# Altium PCB N-DAP.PcbDoc
Units mm, origin at the board's own origin, x right, y up, seen from the top; angles counter-clockwise.
Board outline 32.5 x 19.5 mm, 4 copper layers (Top Layer, GND PLANE, Signal Layer 1, Bottom Layer), stack 1.577 mm thick; 34 components, 41 nets, 126 pads, 46 vias.
Unrouted connection lines stored in the file: 7.
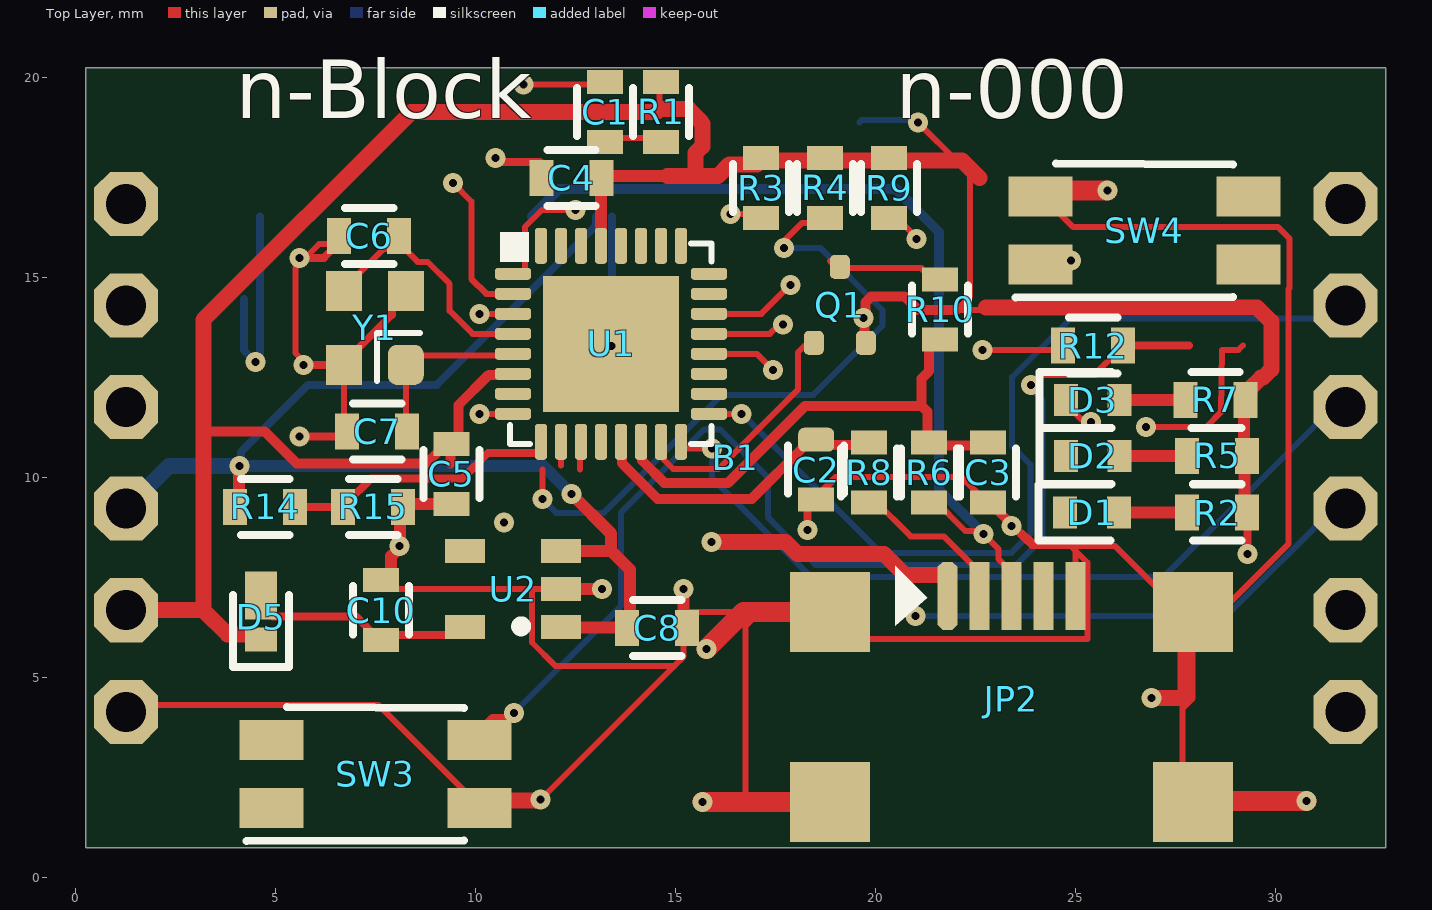
[diagram p0: Top Layer view]
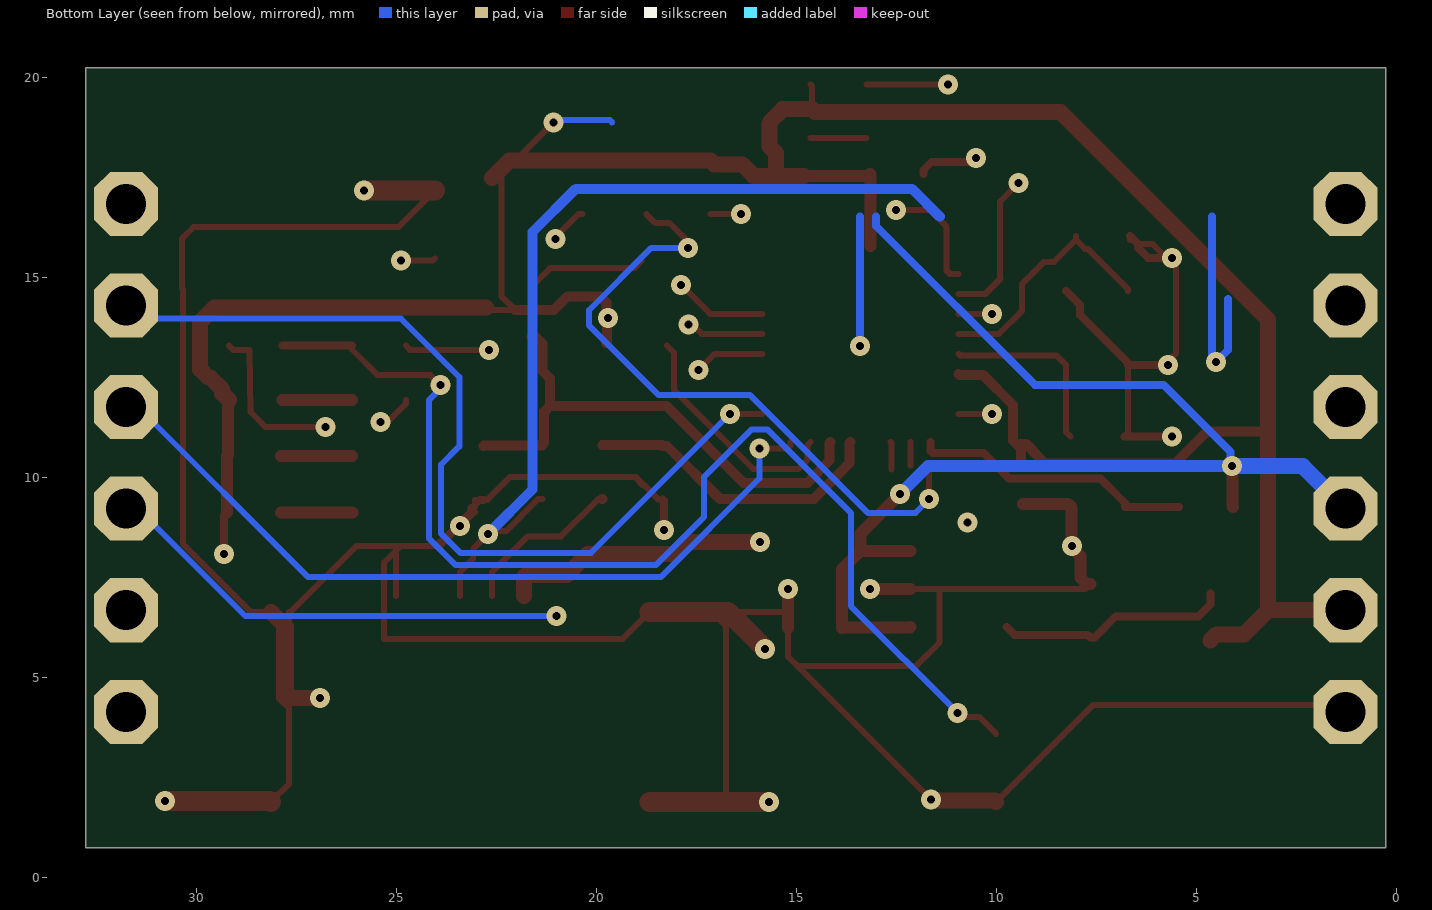
[diagram p1: Bottom Layer view, seen from below]
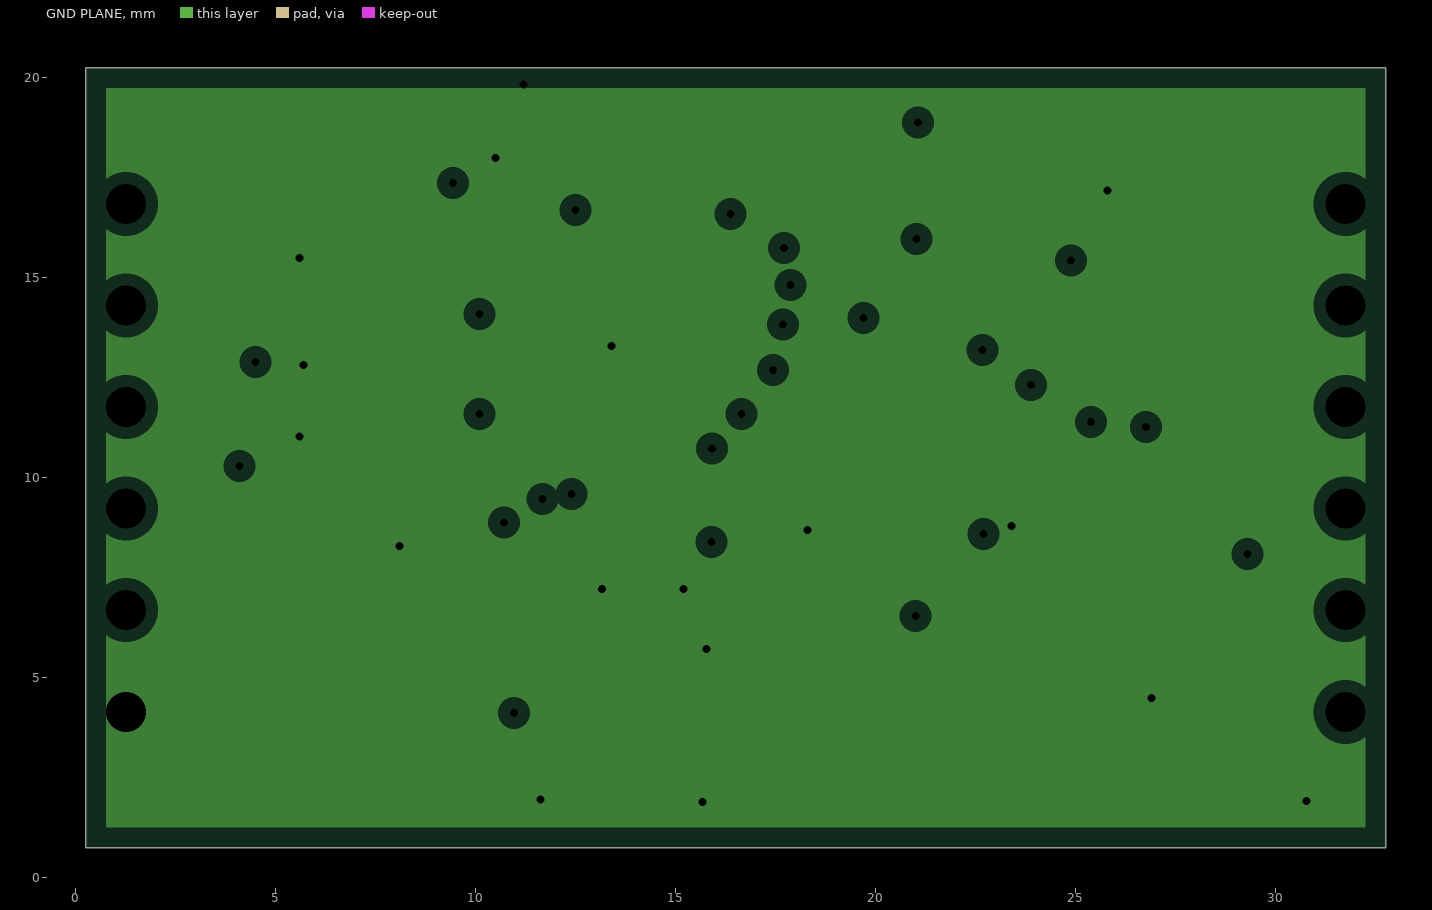
[diagram p2: GND PLANE, clearances drawn from the general rule]
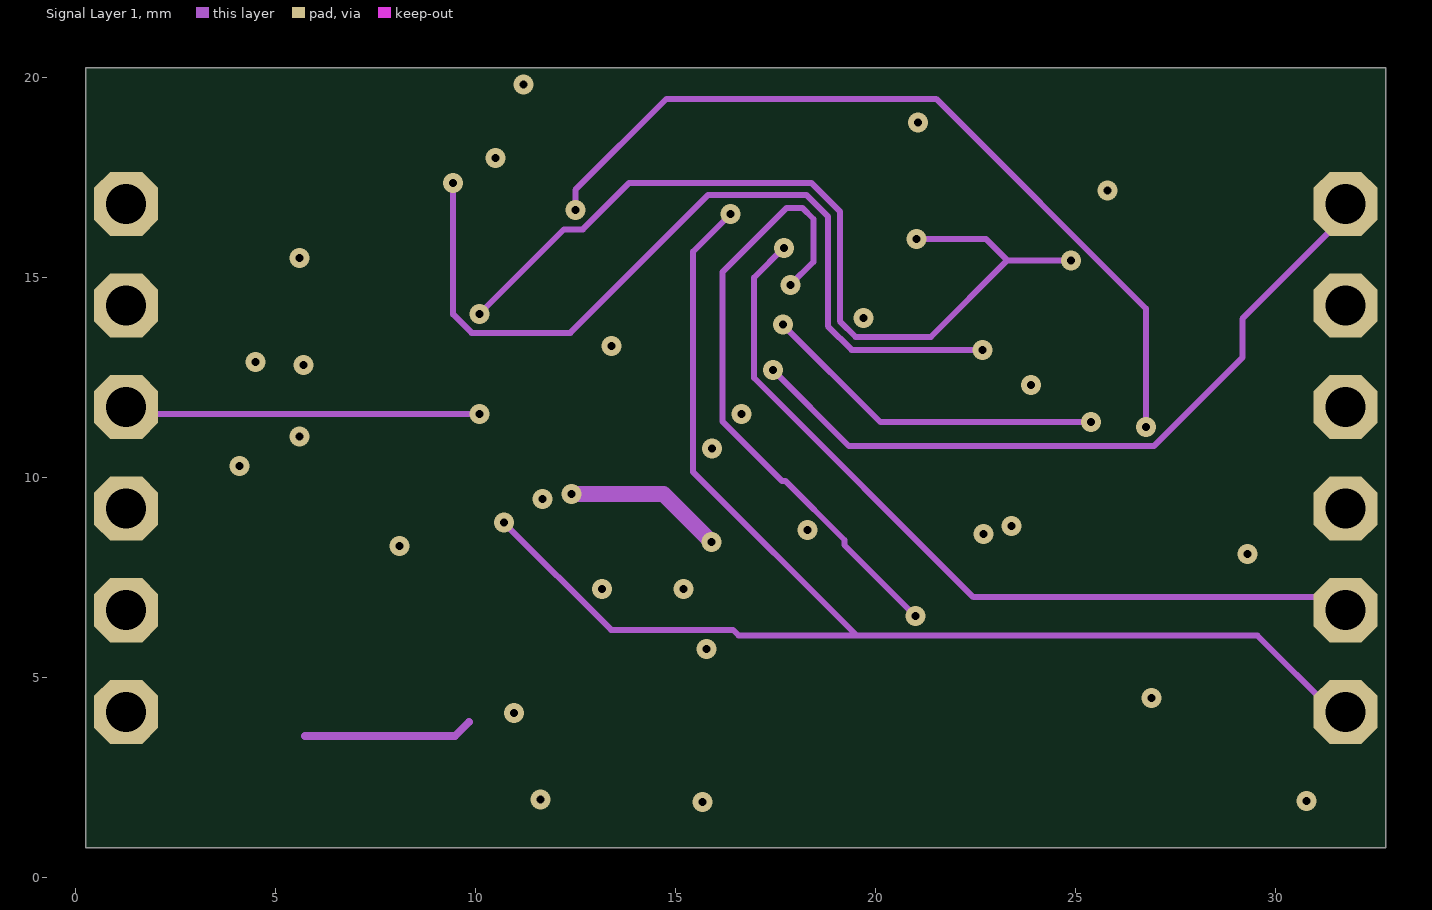
[diagram p3: Signal Layer 1]
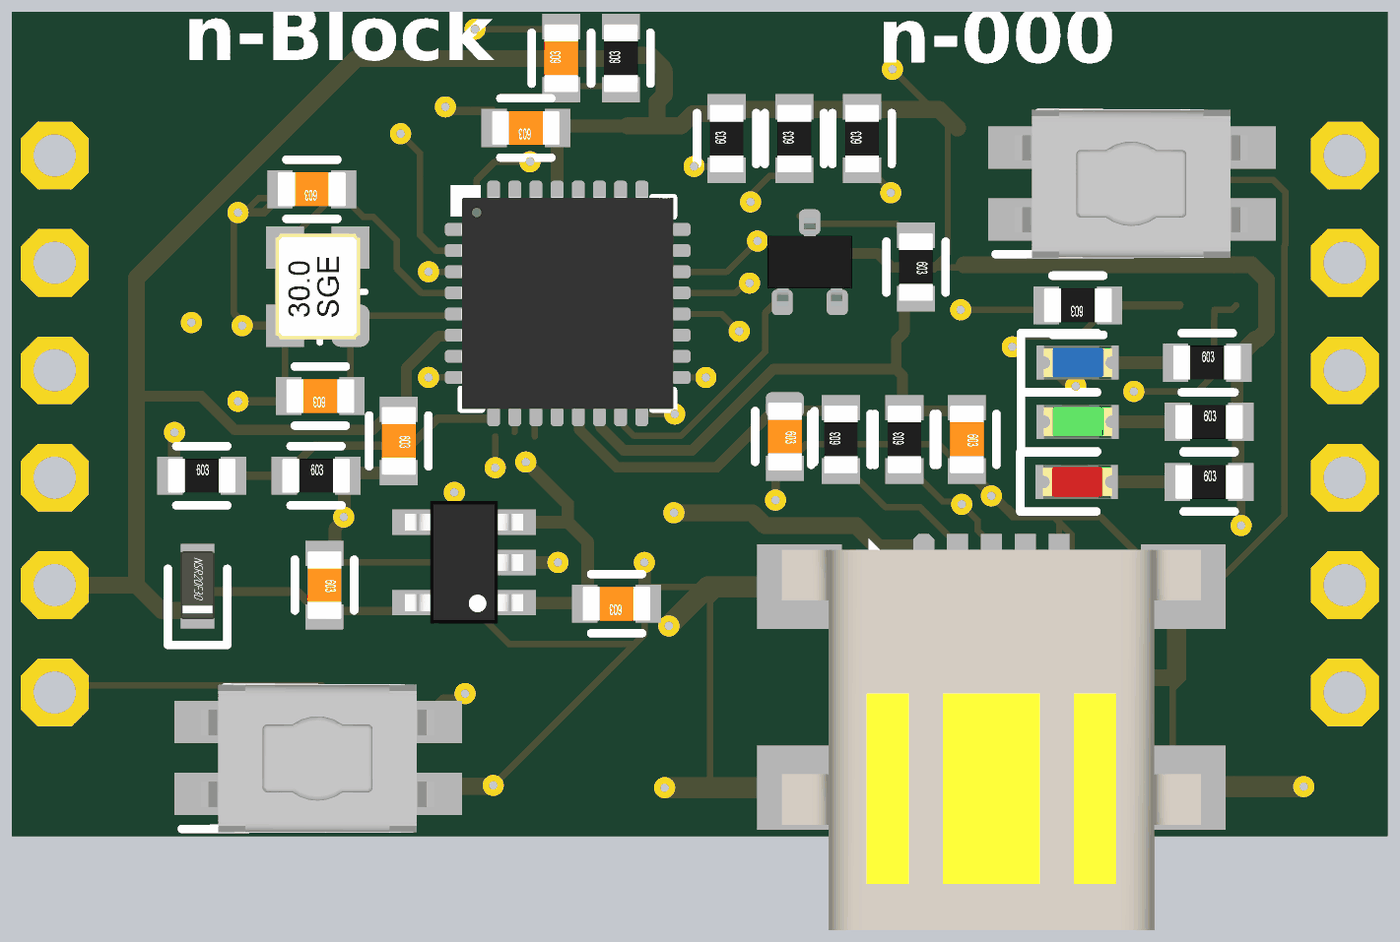
[diagram p4: 3D render of the assembled board from above, using the file's embedded part models]

## Layer stack, top to bottom
Top Solder: solder mask 0.0102, Solder Resist, Dk 3.5
Top Layer: signal copper 0.0356
Dielectric1: core 0.48, FR-4, Dk 4.8
GND PLANE: plane copper 0.036, net GND
Dielectric 4: prepreg 0.7, Dk 4.2
Signal Layer 1: signal copper 0.036
Dielectric 3: core 0.254, Dk 4.2
Bottom Layer: signal copper 0.0356
Bottom Solder: solder mask 0.0102, Solder Resist, Dk 3.5

## Board outline
0.26,0.75 32.76,0.75 32.76,20.25 0.26,20.25

## Design rules (kind name [scope] priority, off if disabled: settings)
Clearance "Clearance IN CLASS 1mm" [(InNetClass('CL-1mm'))] p1 off: gap=1 ignorepadtopadclearanceinfootprint=FALSE except(0: Arc-Hole Track-Hole SMDPad-Hole THPad-Hole Via-Hole Fill-Hole Poly-Hole Region-Hole Text-Hole)
Clearance Clearance_GND_PLANE [InNamedPolygon('GND_POLY_TOP')] p2 off: gap=0.4 ignorepadtopadclearanceinfootprint=FALSE except(0: Arc-Hole Track-Hole SMDPad-Hole THPad-Hole Via-Hole Fill-Hole Poly-Hole Region-Hole Text-Hole)
Clearance Clearance_+5V_POLY [InNamedPolygon('poly_+5V-bottom')] p3 off: gap=0.5 ignorepadtopadclearanceinfootprint=FALSE except(0: Arc-Hole Track-Hole SMDPad-Hole THPad-Hole Via-Hole Fill-Hole Poly-Hole Region-Hole Text-Hole)
Clearance [All] p4: gap=0.15 ignorepadtopadclearanceinfootprint=FALSE except(0: Arc-Hole Track-Hole SMDPad-Hole THPad-Hole Via-Hole Fill-Hole Poly-Hole Region-Hole Text-Hole)
ComponentClearance [InComponentClass('N-DAP')] p1: gap=0.2 collisioncheckmode=3 verticalgap=0.2 showdistances=TRUE
MinimumAnnularRing [All] p1: minimumring=0.124
PlaneClearance [All] p1: clearance=0.3
PlaneConnect Plane_ConnectStyle_1 [(Name = 'C1-1') Or (Name = 'C1-2') Or (Name = 'C2-1') Or (Name = 'C2-2') Or (Name = 'C3-1') Or (Name = 'C3-2') Or (Name = 'C4-1') Or (Name = 'C4-2') Or (Name = 'C5-1') Or (Name = 'C5-2') Or (Name = 'C6-1') Or (Name = 'C6-2') Or (Name = 'C7-1')] p1 off: planeconnectstyle=Relief reliefexpansion=1.27 reliefentries=4 reliefconductorwidth=0.381 reliefairgap=0.508
PlaneConnect [All] p2: planeconnectstyle=Direct reliefexpansion=0.635 reliefentries=4 reliefconductorwidth=0.305 reliefairgap=0.254
PolygonConnect [All] p1: connectstyle=Direct reliefconductorwidth=0.254 reliefentries=4 polygonreliefangle="90 Angle" airgapwidth=0.254
RoomDefinition N-DAP [InComponentClass('N-DAP')] p1: confinementstyle=ConfineIn formatcopy=TRUE lockcomponents=FALSE outline -4.96,45.306 33.775,45.306 33.775,2.126 -4.96,2.126
RoutingVias VIASWITDTH2MM [(InNetClass('W-2mm'))] p1 off: holewidth=1 width=1.8 viastyle="Through Hole" minholewidth=0.4 minwidth=0.7 maxholewidth=1 maxwidth=1.8
RoutingVias VIASWITDTH1MM [(InNetClass('W-2mm'))] p2 off: holewidth=0.5 width=1 viastyle="Through Hole" minholewidth=0.5 minwidth=1 maxholewidth=0.5 maxwidth=1
RoutingVias VIASWITDTH1.5MM [(InNetClass('W-2mm'))] p3 off: holewidth=0.9 width=1.4 viastyle="Through Hole" minholewidth=0.9 minwidth=1.4 maxholewidth=0.9 maxwidth=1.4
RoutingVias [All] p4: holewidth=0.2 width=0.5 viastyle="Through Hole" minholewidth=0.2 minwidth=0.5 maxholewidth=4 maxwidth=2
SilkToSolderMaskClearance SilkscreenOverComponentPads [IsPad] p1: minsilkscreentomaskgap=0.254 clearancetoexposedcopper=TRUE
SolderMaskExpansion [All] p1: expansion=0 istentingtop=FALSE
Width 12V_PLANE [(InNet('+12V')) and (IsPolygon)] p1 off: maxlimit=0.3 minlimit=0.2 preferedwidth=0.2
Width GND_PLANE [(InNet('GND'))  and (IsPolygon)] p2 off: maxlimit=0.3 minlimit=0.2 preferedwidth=0.2
Width WIDTH2MM [(InNetClass('W-2mm'))] p3 off: maxlimit=2 minlimit=0.25 preferedwidth=2
Width WIDTH1.5MM [(InNetClass('W-1.5mm'))] p4 off: maxlimit=2 minlimit=0.5 preferedwidth=1.5
Width "WIDTH 1MM" [(InNetClass('W-1mm'))] p5 off: maxlimit=2 minlimit=0.75 preferedwidth=1
Width WIDTH0.5MM [(InNetClass('W-0.5mm'))] p6 off: maxlimit=2 minlimit=0.25 preferedwidth=0.5
Width WIDTH0.25MM [(InNetClass('W-0.25mm'))] p7 off: maxlimit=2 minlimit=0.2 preferedwidth=0.25
Width [All] p8: maxlimit=2 minlimit=0.149 preferedwidth=0.15
26 further rules are at their usual default settings.

## Components (designator, comment, footprint, x,y, rotation, side; value= is the part's Value field where it differs from the comment)
B1 "N-5" N-5 16.51,10.5 r0 top locked
C1 "100nF" 0603_CAP_SMALL#1 13.24,19.151 r90 top
C2 "18pF" 0603_CAP_SMALL#2 18.52,10.203 r270 top
C3 "18pF" 0603_CAP_SMALL#1 22.82,10.136 r270 top
C4 "100nF" 0603_CAP_SMALL#1 12.4,17.5 r180 top
C5 "100nF" 0603_CAP_SMALL#1 9.4,10.1 r270 top
C6 "33pF" 0603_CAP_SMALL#1 7.345,16.051 r180 top
C7 "33pF" 0603_CAP_SMALL#1 7.545,11.16 r180 top
C8 "1uF/MLCC" 0603_CAP_SMALL#1 14.545,6.251 r180 top
C10 "1uF/MLCC" 0603_CAP_SMALL#1 7.645,6.69 r270 top
D1 "LED_RED_0603" 0603_LED_RED 25.43,9.131 r180 top
D2 "LED_GRN_0603" 0603_LED_GRN 25.445,10.551 r180 top
D3 "LED_BLU_0603" 0603_LED_BLU 25.445,11.951 r180 top
D5 "NSR20F30NXT5G" 0603_DIODE-NSR20F30 4.645,6.526 r270 top
JP2 "USB-MINI-B" USB-MINI-B-HIR-UX60A-MB-5ST-SMALL 23.4,4.4 r180 top
Q1 "BSS84" SOT323/SC70-3_SMALL 19.11,14.325 r180 top
R1 "10K" 0603_res_SMALL 14.645,19.151 r90 top
R2 "680R" 0603_res_SMALL 28.545,9.131 r0 top
R3 "10K" 0603_res_SMALL 17.145,17.251 r90 top
R4 "10K" 0603_res_SMALL 18.745,17.251 r90 top
R5 "470R" 0603_res_SMALL 28.545,10.551 r0 top
R6 "33R" 0603_res_SMALL 21.345,10.136 r90 top
R7 "470R" 0603_res_SMALL 28.5,11.951 r0 top
R8 "33R" 0603_res_SMALL 19.845,10.136 r90 top
R9 "10K" 0603_res_SMALL 20.345,17.251 r90 top
R10 "1.5K" 0603_res_SMALL 21.62,14.211 r270 top
R12 "0R" 0603_res_SMALL 25.445,13.308 r180 top
R14 "10K" 0603_res_SMALL 4.745,9.276 r0 top
R15 "18K" 0603_res_SMALL 7.445,9.276 r0 top
SW3 "EVQ-P2202M" BUTTON_4.7x3.5mm 7.5,2.6 r90 top
SW4 "EVQ-P2202M" BUTTON_4.7x3.5mm 26.725,16.19 r90 top
U1 "LPC11U35FHI33/501" QFN32_0.5mm_PAD 13.39,13.351 r0 top
U2 "TPS78233" SOT23-5_0.95MM-NOSILK 10.94,7.226 r90 top
Y1 "12MHz" CRY-SMD4-2.5x2mm 7.484,13.75 r90 top

## Footprints (in the part's own frame and the unit in brackets; to place one, negate y for a bottom-side part, rotate by r counter-clockwise, add the part's x,y. Pads: shape width x height; smd on the part's side, far side on the other; paste and mask are expansions set on the pad)
0603_CAP_SMALL#1 [mm]
  rect 0.6x0.9 smd: 1(-0.75,0) 2(0.75,0)
  silkscreen extent -0.6,-0.7 0.6,0.7, body extent -0.8,-0.4 0.8,0.4, height 0.3
0603_CAP_SMALL#2 [mm]
  rrect50% 0.6x0.9 smd: 1(-0.75,0)
  rect 0.6x0.9 smd: 2(0.75,0)
  silkscreen extent -0.6,-0.7 0.6,0.7, body extent -0.8,-0.4 0.8,0.4, height 0.3
0603_DIODE-NSR20F30 [mm]
  rect 0.6x0.8 smd mask+0: 1(0.565,0)
  rect 1.2x0.8 smd mask+0: 2(-0.535,0)
  silkscreen extent -0.55,-0.7 1.25,0.7, body extent -0.96,-0.4 0.64,0.4, height 0.31
0603_LED_BLU [mm]
  rect 0.6x0.8 smd: 1(-0.66,0) 2(0.686,0)
  silkscreen extent -0.45,-0.7 1.35,0.7, body extent -0.81,-0.4 0.81,0.4, height 0.6
0603_LED_GRN [mm]
  rect 0.6x0.8 smd: 1(-0.66,0) 2(0.686,0)
  silkscreen extent -0.45,-0.7 1.35,0.7, body extent -0.81,-0.4 0.81,0.4, height 0.6
0603_LED_RED [mm]
  rect 0.6x0.8 smd: 1(-0.66,0) 2(0.686,0)
  silkscreen extent -0.45,-0.7 1.35,0.7, body extent -0.81,-0.4 0.81,0.4, height 0.6
0603_res_SMALL [mm]
  rect 0.6x0.9 smd: 1(-0.75,0) 2(0.75,0)
  silkscreen extent -0.6,-0.7 0.6,0.7, body extent -0.8,-0.4 0.8,0.4, height 0.3
BUTTON_4.7x3.5mm [mm] "TACTILE BUTTON 4.7x3.5mm Panasonic EVQ-P2202M"
  rect 1x1.6 smd: 1(-0.85,2.6) 2(0.85,2.6) 3(-0.85,-2.6) 4(0.85,-2.6)
  silkscreen extent -1.68,-2.22 1.67,3.22, body extent -1.76,-2.73 1.74,2.77, height 2.15
CRY-SMD4-2.5x2mm [mm]
  rrect50% 1x0.9 smd: 1(-0.925,-0.775)
  rect 1x0.9 smd: 2(0.925,-0.775) 3(0.925,0.775) 4(-0.925,0.775)
  silkscreen extent -1.32,-1.13 -0.12,-0.05, body extent -1.35,-1.1 1.35,1.1, height 0.55
N-5 [mil]
  oct 63x63 hole 39.37: 1(-600,250) 2(-600,150) 3(-600,50) 4(-600,-50) 5(-600,-150) 6(-600,-250) 7(600,-250) 8(600,-150) 9(600,-50) 10(600,50) 11(600,150) 12(600,250)
QFN32_0.5mm_PAD [mm]
  rrect50% 0.9x0.3 smd mask+0: 1(-2.45,1.75) 2(-2.45,1.25) 3(-2.45,0.75) 4(-2.45,0.25) 5(-2.45,-0.25) 6(-2.45,-0.75) 7(-2.45,-1.25) 8(-2.45,-1.75) 17(2.45,-1.75) 18(2.45,-1.25) 19(2.45,-0.75) 20(2.45,-0.25) 21(2.45,0.25) 22(2.45,0.75) 23(2.45,1.25) 24(2.45,1.75)
  rrect50% 0.3x0.9 smd mask+0: 9(-1.75,-2.45) 10(-1.25,-2.45) 11(-0.75,-2.45) 12(-0.25,-2.45) 13(0.25,-2.45) 14(0.75,-2.45) 15(1.25,-2.45) 16(1.75,-2.45) 25(1.75,2.45) 26(1.25,2.45) 27(0.75,2.45) 28(0.25,2.45) 29(-0.25,2.45) 30(-0.75,2.45) 31(-1.25,2.45) 32(-1.75,2.45)
  rect 3.4x3.4 smd: 33(0,0)
  silkscreen extent -2.77,-2.51 2.51,2.79, body extent -2.51,-2.51 2.51,2.51, height 0.8
SOT23-5_0.95MM-NOSILK [mm]
  rect 0.6x1 smd: 1(-0.95,-1.2) 2(0,-1.2) 3(0.95,-1.2) 4(0.95,1.2) 5(-0.95,1.2)
  silkscreen extent -1.06,-0.33 -0.81,-0.08, body extent -1.45,-1.4 1.45,1.4, height 1.45
SOT323/SC70-3_SMALL [mm]
  rrect50% 0.5x0.6 smd: 1(0.65,0.95) 2(-0.65,0.95) 3(0,-0.95)
  body extent -1,-1.05 1,1.05, height 1
USB-MINI-B-HIR-UX60A-MB-5ST-SMALL [mm]
  oct 0.5x1.7 smd: 1(1.6,-2.65)
  rect 0.5x1.7 smd: 2(0.8,-2.65) 3(0,-2.65) 4(-0.8,-2.65) 5(-1.6,-2.65)
  rect 2x2 smd: 6(-4.535,2.5) 7(4.535,2.5) 8(-4.535,-2.25) 9(4.535,-2.25)
  silkscreen extent 2.1,-3.4 2.9,-1.9, body extent -4.95,-3.12 4.95,5.87, height 4.6

## Part data
C1 C4 C5: library part C, "CAPACITOR", Supplier Part Number 1=581-06035C104KAT2A, Divider=1, S.Description="Multilayer Ceramic Capacitors MLCC - SMD/SMT 50volts 0.1uF 10% X7R", Supplier 1=Mouser
C2 C3: library part C, "CAPACITOR", Supplier Part Number 1=581-06031A180GAT2A, Divider=1, Supplier 1=Mouser
C6 C7: library part C, "CAPACITOR", Supplier Part Number 1=581-06035A330J, Divider=1, S.Description="Multilayer Ceramic Capacitors MLCC - SMD/SMT 50volts 33pF 5% C0G", Supplier 1=Mouser
C8 C10: library part C, "CAPACITOR", Supplier Part Number 1=81-GCM188R71C105K64D, Divider=1, S.Description="Multilayer Ceramic Capacitors MLCC - SMD/SMT 0603 1.0uF 16volts X7R 10%", Supplier 1=Mouser
D1: library part LED, Supplier Part Number 1=720-LSQ976-NR-1, Divider=1, S.Description="Standard LEDs - SMD Super Red, 633nm 180mcd, 20mA", S.Footprint="0704 (1810 metric)", Supplier 1=Mouser
D2: library part LED, Supplier Part Number 1=604-APT1608SGC, Divider=1, S.Description="Standard LEDs - SMD GREEN WATER CLEAR", S.Footprint="0603 (1608 metric)", Supplier 1=Mouser
D3: library part LED, Supplier Part Number 1=720-LBQ39GL2N2351, Divider=1, S.Description="Standard LEDs - SMD Blue, 470nm 45mcd, 5mA", Supplier 1=Mouser
D5: library part DIODE_NSR20F30, "SCHOTTKY DIODE 0603", Supplier Part Number 1=863-NSR20F30NXT5G, Divider=1.3, S.Description="Schottky Diodes & Rectifiers 0603 FC SCHOTTKY DIODES", S.Footprint=0603, Supplier 1=Mouser
JP2: Supplier Part Number 1=798-UX60A-MB-5ST, Divider=1, S.Description="USB Connectors MINI B RECEPT RA SMT W/O POST", Supplier 1=Mouser
Q1: library part "mosfet BSS84", "POWER MOSFET-P", Supplier Part Number 1=621-BSS84W-F, Divider=1, S.Description="MOSFET -50V 200mW", Supplier 1=Mouser
R1 R3 R4 R9 R14: library part R, "RESISTOR", Supplier Part Number 1=667-ERJ-3EKF1002V, Divider=1, S.Description="Thick Film Resistors - SMD 0603 10Kohms 1% Tol", Supplier 1=Mouser
R2: library part R, "RESISTOR", Supplier Part Number 1=754-RR0816P-681D, Divider=1, S.Description="Thin Film Resistors - SMD 1/16W 680ohm 0.5% 25ppm", Supplier 1=Mouser
R5 R7: library part R, "RESISTOR", Supplier Part Number 1=667-ERJ-3EKF4700V, Divider=1, S.Description="Thick Film Resistors - SMD 0603 470ohms 1% Tol", Supplier 1=Mouser
R6 R8: library part R, "RESISTOR", Supplier Part Number 1=667-ERJ-3EKF33R0V, Divider=1, S.Description="Thick Film Resistors - SMD 0603 33.0ohms 1% Tol", Supplier 1=Mouser
R10: library part R, "RESISTOR", Supplier Part Number 1=667-ERJ-3EKF1501V, Divider=1, S.Description="Thick Film Resistors - SMD 0603 1.5Kohms 1% Tol", Supplier 1=Mouser
R12: library part R, "RESISTOR", Supplier Part Number 1=667-ERJ-3GEY0R00V, Divider=1, S.Description="Thick Film Resistors - SMD 0603 Zero Ohms", Supplier 1=Mouser
R15: library part R, "RESISTOR", Supplier Part Number 1=667-ERJ-3GEYJ183V, Divider=1, S.Description="Thick Film Resistors - SMD 0603 18Kohms 5% Tol", Supplier 1=Mouser
SW3 SW4: library part BUTTON_TACT, "BUTTON TACTILE", Supplier Part Number 1=667-EVQ-P2202M, Divider=1, S.Description="Tactile Switches 4.7x3.5mm SMD Light Touch Switch", Supplier 1=Mouser
U1: Supplier Part Number 1=771-LPC11U35FHI33501, Divider=1, S.Description="ARM Microcontrollers - MCU 32-bit ARM Cortex-M0 64KB Flash 12KB SRAM", Supplier 1=Mouser
U2: library part NCP702N, Supplier Part Number 1=595-TPS78233DDCR, Divider=1, S.Description="LDO Voltage Regulators Sgl Fixed Out LDO 150mA,1uA Quies Crnt", Supplier 1=Mouser
Y1: library part XTAL_4PINS, "CRYSTAL", Supplier Part Number 1=717-8Z-12.000MAAJ-T, Divider=1, S.Description="Crystals 12MHz 30ppm 18pF -20C +70C", Supplier 1=Mouser

## Via types
v1: diameter 0.5, hole 0.2, Top Layer to Bottom Layer, 46 vias

## Nets (pads, with @x,y where several pads share a name; then routed paths per layer and width w, separated by ;. In a path a pad name is that pad's centre, name@x,y a point inside that pad or via, vN(x,y) a via of type N, cw(c..) or ccw(c..) an arc to the next point about the centre after c; other vN are vias at no path point)
3.3V: B1.5 C4.1 C5.1 D5.1 Q1.2 R1.2 R2.2 R3.2 R4.2 R5.2 R7.2 R9.2 U1.6 U1.29 | length 73.4
  Top Layer w0.149: 14.6,19.215 14.6,19.791 R1.2@14.645,19.836
  Top Layer w0.15: v1(21.062,18.89) 22.09,17.862 ; 22.37,17.582 22.37,14.543 22.028,14.2 22.6,14.2
  Top Layer w0.2: R2.2@29.231,9.131 29.3,9.061 v1(29.3,8.1)
  Top Layer w0.25: 3.2,11.16 4.733,11.16 5.533,10.361 8.779,10.361 9.075,10.656 9.075,10.675 9.25,10.85 C5.1 ; 9.383,10.361 9.383,10.743 9.4,10.76 9.402,10.76 9.577,10.935 9.577,11.818 10.335,12.576 10.915,12.576 U1.6 ; Q1.2 19.73,13.405 19.73,13.97 v1(19.7,14) 19.748,14.048 19.748,14.386 19.894,14.532 20.724,14.532 21.056,14.2 22.028,14.2
  Top Layer w0.3: U1.29 13.14,17.58 13.16,17.6 13.21,17.551 14.8,17.551 ; R7.2@29.186,11.951 29.208,11.928 29.208,10.573 29.231,10.551 R2.2@29.231,9.131
  Top Layer w0.4: B1.5 3.2,6.69 ; D5.1@4.645,5.938 4.495,6.088 3.802,6.088 3.2,6.69 ; 14.8,17.551 15.5,17.551 ; 22.6,17.5 22.444,17.656 22.164,17.936 20.345,17.936 18.745,17.936 17.145,17.936 17.045,17.836 16.351,17.836 16.066,17.551 15.5,17.551 ; 22.759,14.265 29.539,14.265 29.9,13.903 29.9,12.713 29.695,12.508 29.644,12.508 29.35,12.215 29.35,12.115 R7.2@29.186,11.951 ; 3.2,6.69 3.2,11.16 3.2,13.949 8.392,19.14 14.525,19.14 14.6,19.215 15.338,19.215 15.644,18.909 15.644,18.871 15.671,18.843 15.671,18.287 15.5,18.116 15.5,17.551
  Bottom Layer w0.15: 19.6,18.89 19.655,18.945 21.007,18.945 v1(21.062,18.89)
3.3V1: C10.2 D5.2 U2.5 | length 5.8
  Top Layer w0.2: D5.2@4.645,7.113 4.645,6.838 4.945,6.538 7.011,6.538 7.545,6.004 7.645,6.004 7.716,6.076 9.54,6.076 U2.5
ADC0: B1.12 U1.20 | length 20.1
  Top Layer w0.15: U1.20 17.034,13.101 v1(17.443,12.692)
  Signal Layer 1 w0.15: v1(17.443,12.692) 19.34,10.795 26.961,10.795 29.171,13.004 29.171,13.977 31.75,16.556 B1.12
ADC1: B1.9 U1.22 | length 29.8
  Top Layer w0.15: U1.22 17.15,14.101 v1(17.875,14.826)
  Signal Layer 1 w0.15: v1(17.875,14.826) 18.451,15.402 18.451,16.47 18.173,16.748 17.779,16.748 16.18,15.149 16.18,11.403 17.66,9.924 17.748,9.924 19.227,8.445 19.227,8.317 v1(20.999,6.545)
  Bottom Layer w0.15: v1(20.999,6.545) 28.771,6.545 31.456,9.23 B1.9
ADC2: U1.23
ADC3: U1.24
ADC5/SWDIO: U1.25
BLUE: D3.2 U1.21 | length 11.6
  Top Layer w0.15: U1.21 17.361,13.601 17.592,13.832 v1(17.687,13.832) ; D3.2 24.759,11.851 25.146,11.464 25.326,11.464 v1(25.393,11.397)
  Signal Layer 1 w0.15: v1(17.687,13.832) 20.123,11.397 v1(25.393,11.397)
BUTTON1: R12.1 SW3.4 | length 29.3
  Top Layer w0.15: SW3.4@10,3.6 10.425,4.025 10.771,4.025 10.871,4.125 v1(10.966,4.125) ; v1(23.894,12.324) 23.905,12.324 24.157,12.576 25.473,12.576 26.105,13.208 R12.1@26.105,13.308
  Top Layer w0.2: R12.1@26.105,13.308 27.84,13.308
  Bottom Layer w0.15: v1(10.966,4.125) 13.635,6.794 13.635,9.125 15.722,11.211 16.116,11.211 17.309,10.017 17.309,9.019 18.503,7.825 23.521,7.825 24.175,8.479 24.175,11.949 23.894,12.229 v1(23.894,12.324)
BUTTON2: R9.1 SW4.1 U1.3 | length 25.3
  Top Layer w0.15: v1(10.102,14.101) U1.3 ; R9.1@20.345,16.59 20.445,16.59 21.024,16.011 v1(21.024,15.969) ; SW4.1@24.025,15.49 24.08,15.435 v1(24.885,15.435)
  Signal Layer 1 w0.15: v1(10.102,14.101) 12.215,16.213 12.685,16.213 13.837,17.365 18.405,17.365 19.11,16.66 19.11,13.919 19.503,13.525 21.39,13.525 23.3,15.435 ; v1(21.024,15.969) 22.766,15.969 23.3,15.435 ; v1(24.885,15.435) 23.3,15.435
GND: B1.6 C1.2 C2.2 C3.2 C4.2 C5.2 C6.2 C7.2 C8.1 C10.1 JP2.5 JP2.6 JP2.7 JP2.8 JP2.9 R15.2 SW3.3 SW4.2 U1.33 U2.2 Y1.2 Y1.4 | length 120.1
  Top Layer w0.149: v1(11.2,19.836) C1.2@13.24,19.836 ; JP2.5 25,8.183 25,8.3
  Top Layer w0.15: B1.6 1.445,4.325 7.575,4.325 SW3.3@10,1.9 ; v1(5.7,12.825) 5.7,12.92 5.502,13.118 5.502,15.253 6.091,15.842 C6.2@6.359,15.842 ; C6.2@6.459,15.842 6.568,15.951 C6.2@6.659,15.951 ; Y1.4 6.709,11.125 C7.2@6.798,11.036 ; C10.1@7.645,7.35 7.77,7.226 11.423,7.226 ; v1@11.576,1.9 14.976,5.3 ; U2.2 11.423,7.226 ; C8.1@15.205,6.251 15.205,5.529 14.976,5.3 ; C8.1@15.205,6.65 16.706,6.65 ; 16.757,1.925 16.757,6.304 17.103,6.65 ; C2.2@18.345,9.465 18.445,9.465 18.786,9.806 ; JP2.9@18.665,6.65 19.34,5.975 25.299,5.975 25.299,7.883 25,8.183 24.885,8.298 ; C3.2@22.82,9.45 22.72,9.45 22.283,9.887 22.283,9.893 22.151,10.025 19.043,10.025 ; C3.2@23.031,9.15 23.333,8.848 23.333,8.733 23.467,8.733 23.732,8.468 23.902,8.298 24.021,8.298 ; C3.2@23.031,9.45 23.031,9.288 C3.2@23.145,9.175 ; v1@23.515,8.78 23.779,8.515 23.804,8.515 24.021,8.298 ; SW4.2@24.025,17.19 24.947,16.269 30.068,16.269 30.35,15.986 30.35,14.746 30.325,14.721 30.325,8.34 28.635,6.65 JP2.8@28.135,6.65 ; JP2.8@27.933,6.448 27.933,6.265 27.933,4.488 27.679,4.234 ; JP2.6@28.135,1.9 27.679,2.356 27.679,4.234 ; 11.423,7.226 11.415,7.218 11.415,5.882 11.997,5.3 14.976,5.3 ; 18.786,9.806 19.005,10.025 19.043,10.025 ; 18.786,9.806 18.824,9.806 19.043,10.025 ; 24.021,8.298 24.885,8.298 ; 24.885,8.298 25,8.298 25.987,8.298 27.635,6.65 27.679,6.65 27.679,6.265 27.679,4.5 27.679,4.234
  Top Layer w0.2: v1(5.6,11.036) C7.2@6.798,11.036 ; v1(5.6,15.5) 6.209,15.5 6.459,15.751 6.459,15.851 C6.2@6.659,16.051 ; v1(5.7,12.825) Y1.4 6.709,12.875 7.909,14.075 7.909,14.325 Y1.2 ; v1(10.5,18) 10.581,18 10.681,17.9 11.614,17.9 11.814,17.7 C4.2@11.814,17.6 ; v1(18.3,8.7) 18.3,9.42 C2.2@18.345,9.465 ; C3.2@22.82,9.45 22.92,9.45 C3.2@22.975,9.394 ; C3.2@23.12,9.25 23.12,9.15 23.4,8.87 v1(23.4,8.8)
  Top Layer w0.3: C10.1@7.645,7.35 7.745,7.35 7.895,7.5 7.895,8.041 8.1,8.246 v1(8.1,8.3) 8.115,8.315 8.115,9.26 8.2,9.345 C5.2@9.331,9.345 ; U2.2 v1(13.16,7.226) ; v1(15.2,7.226) 15.205,7.22 15.205,6.65 C8.1@15.205,6.251
  Top Layer w0.4: SW3.3@10,1.9 10.035,1.935 11.611,1.935 v1(11.63,1.954) ; v1(26.9,4.5) 27.74,4.5 27.75,4.51 27.75,6.265 27.933,6.448 JP2.8@28.135,6.65
  Top Layer w0.5: v1(15.68,1.9) 16.757,1.9 JP2.7@18.665,1.9 ; v1(15.78,5.724) 16.706,6.65 17.103,6.65 JP2.9@18.665,6.65 ; SW4.2@24.025,17.19 v1(25.8,17.19) ; JP2.6@28.135,1.9 28.159,1.924 v1(30.78,1.924)
  Bottom Layer w0.2: v1(13.4,13.3) 13.41,13.31 13.41,16.53
GREEN: D2.2 U1.12
LPC11-D+: JP2.3 R6.1 | length 22.5
  Top Layer w0.149: R6.1@21.345,9.475 21.445,9.475 22.253,8.667 22.633,8.667 23.074,8.226 23.074,7.976 23.4,7.65 JP2.3
  Bottom Layer w0.25: 11.41,16.53 12.105,17.225 20.51,17.225 21.591,16.144 21.591,9.709 v1(22.7,8.6)
LPC11-D-: JP2.2 R8.1 | length 4.1
  Top Layer w0.149: R8.1@19.853,9.467 19.953,9.467 20.883,8.538 21.712,8.538 22.6,7.65 JP2.2
  Top Layer w0.25: R8.1@19.845,9.475 R8.1@19.853,9.467
LPC11-USBD+: C3.1 R6.2 R10.2 U1.14 | length 13
  Top Layer w0.25: U1.14 14.165,10.876 14.165,10.431 14.72,9.876 16.321,9.876 18.245,11.8 21.154,11.8 ; R10.2@21.62,13.525 21.52,13.525 21.345,13.35 21.345,12.671 21.154,12.479 21.154,11.8 ; C3.1@22.82,10.796 22.807,10.809 21.358,10.809 21.3,10.867 21.3,11.654 21.154,11.8
LPC11-USBD-: C2.1 R8.2 U1.13 | length 7.7
  Top Layer w0.25: U1.13 13.665,10.876 13.665,10.365 14.554,9.476 16.91,9.476 18.23,10.796 18.345,10.796 18.365,10.816 19.84,10.816 R8.2@19.845,10.821
LPC11-USBSCON: Q1.1 U1.15 | length 5.9
  Top Layer w0.15: U1.15 14.715,10.826 14.715,10.451 14.941,10.226 16.08,10.226 18.06,12.206 18.06,13.133 Q1.1@18.235,13.308
LPC11-USBVBUS: R14.2 R15.1 U1.9 | length 7.1
  Top Layer w0.2: R14.2@5.431,9.276 6.785,9.276 6.785,9.376 7.395,9.986 9.679,9.986 10.319,10.626 11.59,10.626 11.64,10.676 U1.9
MOSI0: U1.18
NetD1_1: D1.1 R2.1 | length 1.8
  Top Layer w0.3: D1.1 R2.1@27.885,9.131
NetD2_1: D2.1 R5.1 | length 1.8
  Top Layer w0.3: D2.1 R5.1@27.885,10.551
NetD3_1: D3.1 R7.1 | length 1.7
  Top Layer w0.3: D3.1 R7.1@27.84,11.951
NetQ1_3: Q1.3 R10.1 | length 3
  Top Layer w0.15: Q1.3@18.87,15.417 19.045,15.242 21.149,15.242 21.52,14.871 R10.1@21.62,14.871
PIN1: U1.1 | length 27.9
  Top Layer w0.15: U1.1 11.165,15.101 11.24,15.176 11.24,16.275 11.665,16.7 v1(12.5,16.7) ; v1(26.765,11.27) 28.263,11.27 28.644,11.651 28.67,13.2 29.077,13.2 29.186,13.308
  Signal Layer 1 w0.15: v1(12.5,16.7) 12.5,17.198 14.777,19.475 21.517,19.475 26.765,14.227 v1(26.765,11.27)
PIO0_5/SWCLK: U1.19
PIO1_1: U1.28
RED: D1.2 U1.7
RESET-IO: U1.30
RESET-LPC11: C1.1 R1.1 R12.2 U1.2 | length 29.2
  Top Layer w0.15: v1(9.442,17.366) 9.9,16.907 9.9,14.966 10.265,14.601 10.28,14.601 ; 9.899,14.982 10.28,14.601 ; U1.2 10.28,14.601 ; C1.1@13.24,18.49 R1.1@14.645,18.49 ; v1(22.675,13.2) 24.651,13.2 R12.2@24.759,13.308
  Signal Layer 1 w0.15: v1(9.442,17.366) 9.442,14.089 9.905,13.626 12.373,13.626 15.813,17.065 18.28,17.065 18.81,16.536 18.81,13.794 19.404,13.2 v1(22.675,13.2)
RESET-TGT: B1.3 U1.8 | length 9.7
  Top Layer w0.15: v1(10.102,11.601) U1.8
  Signal Layer 1 w0.15: B1.3 1.439,11.601 v1(10.102,11.601)
RXD0: B1.2 U1.31
SCL1: B1.7 R3.1 U1.10 | length 37
  Top Layer w0.15: 12.14,10.31 U1.10 ; v1(16.376,16.59) R3.1@17.145,16.59
  Signal Layer 1 w0.15: v1(10.712,8.882) 13.394,6.199 16.439,6.199 16.581,6.057 19.531,6.057 ; v1(16.376,16.59) 15.444,15.658 15.444,10.144 19.531,6.057 ; B1.7 31.456,4.15 29.549,6.057 19.531,6.057
SDA1: B1.8 R4.1 U1.11 | length 37.8
  Top Layer w0.15: v1(11.677,9.466) 11.677,10.203 ; 12.615,10.203 12.615,10.875 U1.11 ; v1(17.711,15.751) 17.711,15.913 18.163,16.365 18.52,16.365 R4.1@18.745,16.59
  Signal Layer 1 w0.15: v1(17.711,15.751) 16.968,15.008 16.968,12.495 22.448,7.015 31.425,7.015 B1.8
  Bottom Layer w0.15: v1(11.677,9.466) 12.018,9.125 13.212,9.125 16.161,12.075 18.447,12.075 20.175,13.803 20.175,14.197 18.621,15.751 v1(17.711,15.751)
SLEEP-REQ: U1.27
SWCLK: B1.10 U1.16 | length 20.3
  Top Layer w0.15: U1.16 15.14,10.811 15.215,10.736 v1(15.919,10.736)
  Bottom Layer w0.15: v1(15.919,10.736) 15.919,9.985 18.379,7.525 27.211,7.525 31.456,11.77 B1.10
SWDIO: B1.11 U1.17 | length 22.9
  Top Layer w0.15: U1.17 v1(16.655,11.6)
  Bottom Layer w0.15: v1(16.655,11.6) 20.13,8.125 23.397,8.125 23.875,8.603 23.875,10.334 23.419,10.79 23.419,12.521 24.884,13.985 31.425,13.985 B1.11
TXD0: B1.1 U1.32
VBUS: B1.4 C8.2 JP2.1 R14.1 U2.1 U2.3 | length 42.4
  Top Layer w0.3: R14.1@4.085,9.276 4.092,9.283 4.092,10.292 v1(4.1,10.3) ; U2.1 12.153,6.263 13.847,6.263 13.859,6.251 13.859,7.707 13.391,8.176 ; U2.3 13.391,8.176 ; v1(12.4,9.6) 13.391,8.609 13.391,8.176
  Top Layer w0.4: v1(15.9,8.4) 17.751,8.4 18.051,8.1 20.21,8.1 20.735,7.575 21.75,7.575 21.8,7.525 JP2.1
  Signal Layer 1 w0.4: v1(12.4,9.6) 14.7,9.6 v1(15.9,8.4)
  Bottom Layer w0.2: v1(4.1,10.3) 4.143,10.343 4.143,10.65 5.818,12.325 9.034,12.325 13.01,16.301 13.01,16.53
  Bottom Layer w0.3: v1(4.1,10.3) 11.7,10.3 v1(12.4,9.6)
  Bottom Layer w0.4: B1.4 2.334,10.294 4.094,10.294 v1(4.1,10.3)
WAKE-REQ: U1.26
X5: C6.1 U1.4 Y1.3 | length 6.4
  Top Layer w0.15: Y1.3 6.709,14.725 7.71,15.726 7.78,15.726 C6.1@8.005,15.951 ; U1.4 9.93,13.601 9.354,14.177 9.354,14.848 8.802,15.4 8.556,15.4 C6.1@8.005,15.951 ; C6.1@8.005,15.951 8.005,16.051 C6.1@8.005,15.951
X6: C7.1 U1.5 Y1.1 | length 4.6
  Top Layer w0.15: C7.1@8.145,11.036 8.259,11.15 Y1.1 8.497,13.063 10.902,13.063 U1.5
pads on no net: JP2.4 SW3.1 SW3.2 SW4.3 SW4.4 U2.4
copper on no net: | length 9.6
  Signal Layer 1 w0.2: 5.745,3.551 9.495,3.551 9.845,3.901
  Bottom Layer w0.2: 4.21,14.47 4.21,13.19 v1(4.5,12.9) 4.61,13.01 4.61,14.47 4.61,16.53

## Polygon pours and split planes (outlines as drawn)
GND on GND PLANE (split plane): 32.25,1.26 0.77,1.26 0.77,19.74 32.25,19.74

## Silkscreen, mask and mechanical layers (free items; w line width, h text height)
Mechanical 2:
  lines w0.15: 202.494,95.012 202.539,95.057
Mechanical 3:
  lines w0.15: 0.26,0.75 12.015,0.75 32.76,0.75 32.76,20.25 0.26,20.25 0.26,0.75
Mechanical 15:
  text "R13 IS NO ASSEMBLY" at 19.745,18.801 h1

## Text inside footprints (layer, text, board x,y; h text height)
B1: Top Overlay "n-000" at 20.51,18.5 h2.5; Top Overlay "n-Block" at 4.01,18.5 h2.5